# Altium PCB ANALOG_CAN2.PcbDoc (part 2 of 2)
Units mm, origin at the board's own origin, x right, y up, seen from the top; angles counter-clockwise.
Board outline 100 x 55 mm, 2 copper layers (Top Layer, Bottom Layer); 137 components, 132 nets, 459 pads, 72 vias.
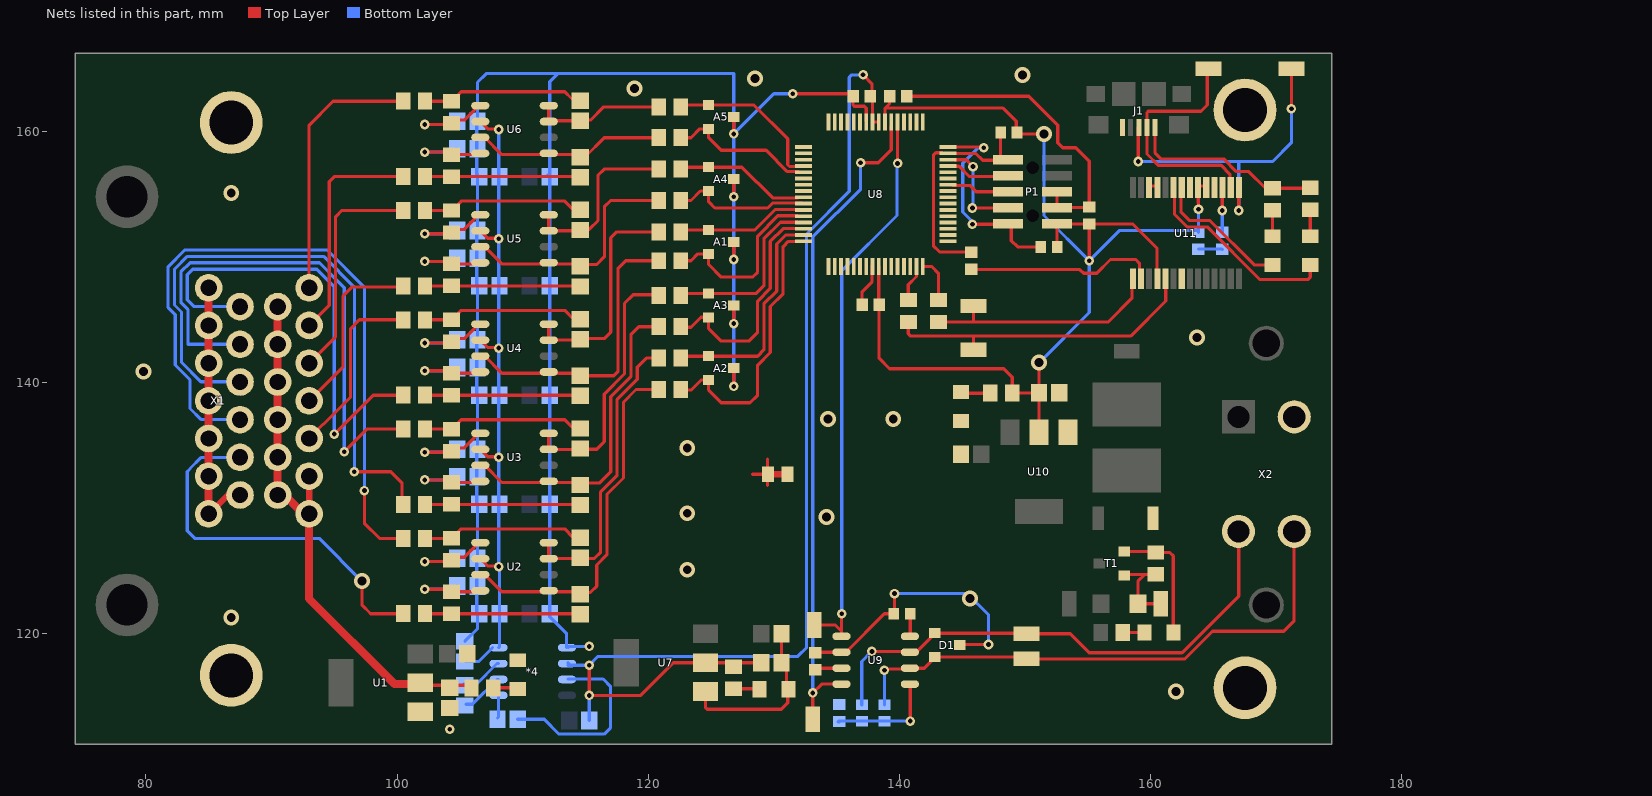
[diagram p2: the nets of this part, all layers, seen from the top]

## Via types
v1: diameter 0.762, hole 0.381, Top Layer to Bottom Layer, 54 vias
v2: diameter 1.27, hole 0.711, Top Layer to Bottom Layer, 18 vias

## Nets (pads, with @x,y where several pads share a name; then routed paths per layer and width w, separated by ;. In a path a pad name is that pad's centre, name@x,y a point inside that pad or via, vN(x,y) a via of type N, cw(c..) or ccw(c..) an arc to the next point about the centre after c; other vN are vias at no path point) (continued)
-10V: *4.4 C33.1 C34.1 C35.1 C36.1 C37.1 C49.2 U2.2 U3.2 U4.2 U5.2 U6.2 | length 52.6
  Top Layer w0.254: U2.2@106.625,125.985 107.214,125.396 108.054,125.396 v1(108.1,125.35) ; U3.2@106.625,134.685 107.214,134.096 108.054,134.096 v1(108.1,134.05) ; U4.2@106.625,143.385 107.214,142.796 108.054,142.796 v1(108.1,142.75) ; U5.2@106.625,152.085 107.214,151.496 108.054,151.496 v1(108.1,151.45) ; U6.2@106.625,160.785 107.214,160.196 108.054,160.196 v1(108.1,160.15)
  Bottom Layer w0.254: C49.2@105.4,117.8 106.5,117.8 *4.4@107.6,118.9 ; *4.4@108.1,118.9 108.15,118.95 C34.1@108.15,121.6 108.15,125.25 108.1,125.3 v1(108.1,125.35) 108.1,130.3 v1(108.1,134.05) 108.1,139 v1(108.1,142.75) 108.1,147.7 v1(108.1,151.45) 108.1,156.5 v1(108.1,160.15)
AGND: *4.5 A1.3 A2.3 A3.3 A4.3 A5.3 C1.1 C2.1 C13.1 C14.1 C16.1 C27.1 C28.1 C29.1 C30.1 C31.1 C33.2 C34.2 C35.2 C36.2 C37.2 C38.1 C39.1 C40.1 C41.1 C42.1 C43.1 C44.1 C45.1 C46.1 C47.1 C49.1 LED.2@109.6,117.9 LED.2@131.15,115.6 N1.1 pad.1@86.8,116.7 pad.1@86.8,160.7 U1.1 U7.1 U8.10 X1.19 X1.20 X1.21 X1.22 X1.23 X1.24 X1.25 X1.26 | length 197
  Top Layer w0.254: X1.19@86.6,131.1 87.45,131.1 X1.19@87.5,131.05 ; U7.1@124.55,115.4 124.55,114.15 124.7,114 130.6,114 131.1,114.5 LED.2@131.1,115.6 ; v1(126.8,139.7) A2.3@126.8,141.05 ; v1(126.8,144.7) A3.3@126.8,146.05 ; v1(126.8,149.8) A1.3@126.8,151.15 ; v1(126.8,154.8) A4.3@126.8,156.15 ; v1(126.8,159.8) A5.3@126.8,161.15 ; 128.3,132.7 N1.1@129.169,132.7 ; 129.5,131.8 N1.1@129.5,132.369 ; N1.1@129.5,133.3 129.5,133.9 ; C14.1@130.6,117.4 C13.1@130.6,120 ; C14.1@131,117.5 131,115.75 LED.2@131.15,115.6 ; v1(131.5,163) 136.3,163 C16.1@136.4,162.9 ; C16.1@136.3,162.7 136.3,162.1 136.4,162 137.2,162 137.35,161.85 U8.10@137.35,160.75 ; C16.1@136.3,163.075 C16.1@136.325,163.1
  Top Layer w0.5: X1.26@85,129.5 X1.19@86.6,131.1
  Top Layer w0.635: X1.26@85,129.55 X1.25@85,132.55 X1.24@85,135.55 X1.23@85,138.55 X1.22@85,141.55 X1.21@85,144.55 X1.20@85,147.55 X1.20@85,147.6
  Bottom Layer w0.254: C49.1@105.4,119.4 106.4,120.4 C34.2@106.4,121.6 ; C34.2@106.35,121.6 C39.1@106.35,126.009 ; C33.2@106.35,130.3 C41.1@106.35,134.709 ; C35.2@106.35,139 C43.1@106.35,143.409 ; C36.2@106.35,147.7 C45.1@106.35,152.109 ; C37.2@106.35,156.4 106.35,158.604 C47.1@106.35,160.809 ; C39.1@106.4,126.009 C33.2@106.4,130.3 ; C41.1@106.4,134.709 C35.2@106.4,139.1 ; C43.1@106.4,143.409 C36.2@106.4,147.8 ; C45.1@106.4,152.109 C37.2@106.4,156.6 ; C47.1@106.4,160.808 106.4,163.9 107.1,164.6 112.8,164.6 ; C31.1@112,156.5 C31.1@112.15,156.65 ; *4.5@113.5,118.9 113.5,120 112.15,121.35 C27.1@112.15,121.6 C28.1@112.15,130.3 C29.1@112.15,139 C30.1@112.15,147.7 C31.1@112.15,156.4 C31.1@112.15,156.65 ; *4.5@113.6,118.9 113.7,119 v1(115.3,119) ; v1(126.8,139.7) v1(126.8,144.7) v1(126.8,149.8) v1(126.8,154.8) v1(126.8,159.8) ; v1(131.5,163) 130,163 v1(126.8,159.8) ; C31.1@112.15,156.65 112.15,163.95 112.8,164.6 ; 112.8,164.6 126.8,164.6 v1(126.8,159.8)
  other v1: 104.2,112.4
  other v2: 86.8,121.3 123.1,125.1 123.1,129.6 123.1,134.8 79.8,140.9 86.8,155.1 118.9,163.4 128.5,164.2
AVCC: *4.6 C14.2 C16.2 C26.2 R32.1 U7.2 U8.8 U8.9 | length 91
  Top Layer w0.254: v1(115.3,117.5) v1(115.3,115.1) 119.4,115.1 122,117.7 U7.2@124.55,117.7 C14.2@128.8,117.7 ; v1(137.1,164.5) 137.8,163.8 C16.2@137.8,162.9 ; C16.2@137.8,162.8 137.85,162.75 U8.9@137.85,160.75 138.25,160.75 U8.8@138.3,160.7
  Bottom Layer w0.254: *4.6@113.6,117.5 v1(115.3,117.5) 116,118.2 131.9,118.2 132.592,118.892 132.592,132.6 ; *4.6@113.6,117.7 *4.6@113.7,117.6 ; C26.2@115.3,113.1 v1(115.3,115.1) ; 132.592,132.692 132.592,151.81 136,155.218 136,164.3 136.2,164.5 v1(137.1,164.5)
CAN_N: D1.2 R43.1 TEST_CANN1.1 U9.6 X2.3 | length 44.8
  Top Layer w0.254: v1(138.8,117.1) 138.9,117.2 U9.6@140.8,117.2 ; U9.6@140.825,117.265 141.965,117.265 142.8,118.1 D1.2@142.8,118.15 TEST_CANN1.1@150.05,118.15 ; TEST_CANN1.1@150.1,118.2 TEST_CANN1.1@150.05,118.15 ; X2.3@171.4,128.1 171.4,121 170.6,120.2 164.918,120.2 162.71,117.992 154.89,117.992 154.882,118 150.2,118 150.1,117.9 149.8,117.9 TEST_CANN1.1@150.05,118.15
  Bottom Layer w0.254: R43.1@138.8,114.35 v1(138.8,117.1)
CAN_P: D1.1 R44.2 TEST_CANP1.1 U9.7 X2.4 | length 42
  Top Layer w0.254: v1(137.8,118.6) U9.7@140.8,118.6 ; U9.7@140.825,118.535 141.335,118.535 142.8,120 D1.1@142.8,120.05 150.05,120.05 TEST_CANP1.1@150.1,120.1 ; TEST_CANP1.1@150.1,120 153.6,120 155.1,118.5 162.5,118.5 167,123 X2.4@167,128.1
  Bottom Layer w0.254: R44.2@137,114.35 137,117.8 v1(137.8,118.6)
D_N: J1.2 TEST_USBD_N1.1 U11.16 | length 19.3
  Top Layer w0.254: TEST_USBD_N1.1@164.5,164.8 164.5,162.1 164,161.6 159.8,161.6 159.7,161.5 J1.2@159.7,160.3 159.7,158.2 160.6,157.3 165.6,157.3 166.3,156.6 166.3,155.7 U11.16@166.35,155.65
D_P: J1.3 TEST_USBD_P1.1 U11.15 | length 26.7
  Top Layer w0.254: v1(159,157.6) J1.3@159,160.3 ; v1(167,153.7) U11.15@167,155.65 ; v1(171.2,161.8) 171.2,164.4
  Bottom Layer w0.254: v1(159,157.6) 167,157.6 ; v1(167,153.7) 167,157.6 ; v1(171.2,161.8) 171.2,159.1 169.7,157.6 167,157.6
DGND: C15.1 C17.1 C18.1 C19.1 C21.1 C22.1 C23.1 C24.1 C25.1 D1.3 D3.1 J1.5 LED.2@144.9,136.95 N1.2 P1.3 P1.5 pad.1@167.5,115.7 pad.1@167.5,161.7 POWER1.2 R33.1 R40.1 T1.2 U8.40 U9.2 U10.1 U11.7 U11.18 U11.21 U11.25 U11.26 X2.2 | length 63.5
  Top Layer w0.254: C15.1@133.3,118.5 133.335,118.535 U9.2@135.375,118.535 ; U9.2@135.4,118.5 135.7,118.5 138.8,121.6 R33.1@139.55,121.6 ; C17.1@137.025,146.2 137.025,147.225 137.8,148 U8.40@137.8,149.3 ; R33.1@139.6,121.6 v1(139.6,123.2) ; C18.1@140.575,162.8 149.937,162.8 ; D1.3@144.8,119.1 144.85,119.15 v1(147.087,119.15) ; 149.9,162.8 150.3,162.8 152.6,160.5 152.6,159.1 153,158.7 154.037,158.7 155.1,157.637 155.1,153.9 155.07,153.93 P1.3@152.55,153.93 152.55,155.15 P1.5@152.5,155.2 ; C21.1@152.7,138.8 C21.1@152.7,139.2 ; T1.2@157.9,126.55 R40.1@160.15,126.55 ; U11.26@159.85,155.65 U11.25@160.45,155.65 ; R40.1@160.1,126.6 R40.1@160.15,126.55 ; R40.1@160.2,126.6 R40.1@160.15,126.55 ; R40.1@160.4,126.475 161.525,126.475 161.8,126.2 POWER1.2@161.8,120.1 ; U11.25@160.5,155.65 U11.25@160.5,155.7
  Bottom Layer w0.254: v1(139.6,123.2) 145.4,123.2 147.087,121.513 v1(147.087,119.15) ; C24.1@163.8,150.625 165.675,150.625 C23.1@165.7,150.6
  other v2: 162,115.4 145.6,122.8 134.2,129.3 134.3,137.1 139.5,137.1 163.7,143.6 149.8,164.5
DVCC: C17.2 C18.2 C21.2 C22.2 C24.2 P1.1 R36.1 R37.2 R38.2 U8.7 U8.41 U10.2 U11.4 U11.19 U11.20 | length 93.8
  Top Layer w0.254: U8.41@138.35,149.25 138.35,146.25 C17.2@138.4,146.2 ; C17.2@138.375,146.2 138.375,141.925 139.2,141.1 148.3,141.1 148.98,140.42 R36.1@148.98,139.179 ; U8.7@138.85,160.75 138.85,161.85 ; C18.2@139.2,162.7 139.2,162.2 138.85,161.85 ; R36.1@149,139.2 149.021,139.179 C21.2@151.1,139.179 ; R37.2@149.3,159.9 149.3,160.8 148.25,161.85 138.85,161.85 ; R37.2@149.4,159.9 149.5,159.8 v2(151.5,159.8) ; U10.2@151.1,136.05 C21.2@151.1,139.179 ; C21.2@151.1,139.2 C21.2@151.1,139.179 ; v2(151.109,141.591) C21.2@151.109,139.179 C21.2@151.1,139.179 ; P1.1@152.55,152.66 152.55,150.85 R38.2@152.6,150.8 ; P1.1@153.4,152.6 153.425,152.625 C22.2@155.1,152.625 158.575,152.625 160.5,150.7 U11.4@160.5,148.4 ; v1(155.1,149.7) C22.2@155.1,152.6 ; v1(163.8,153.8) 163.75,155.65 164.35,155.65 U11.19@164.4,155.6 ; U11.19@164.375,155.675 U11.19@164.4,155.7
  Bottom Layer w0.254: v2(151.109,141.591) 155.1,145.581 v1(155.1,149.7) ; v2(151.5,159.8) 151.5,153.3 v1(155.1,149.7) ; C24.2@163.7,152.1 157.5,152.1 v1(155.1,149.7) ; C24.2@163.8,151.975 v1(163.8,153.8)
DVCC_5V: J1.1 R41.2 R42.2 | length 15.5
  Top Layer w0.254: J1.1@160.35,160.3 160.35,158.268 160.81,157.808 165.81,157.808 166.818,156.8 167.8,156.8 169.1,155.5 R41.2@170.2,155.5 ; R41.2@170.2,155.475 172.675,155.475 R42.2@172.7,155.5
FTDI_GREEN: D5.2 U11.23 | length 16.2
  Top Layer w0.254: U11.23@161.892,155.558 161.892,153.39 162.89,152.392 164.508,152.392 168.7,148.2 172.5,148.2 172.7,148.4 D5.2@172.7,149.35
FTDI_RED: D4.2 U11.22 | length 10.7
  Top Layer w0.254: U11.22@162.4,155.28 162.4,153.6 163.1,152.9 164.718,152.9 168.268,149.35 D4.2@169.7,149.35
FTDI_UART_RX: R34.2 U8.47 | length 2.9
  Top Layer w0.254: R34.2@140.7,146.6 140.7,147.8 141.35,148.45 U8.47@141.35,149.25
FTDI_UART_TX: R35.2 U8.48 | length 3.6
  Top Layer w0.254: U8.48@141.858,149.25 142.55,149.25 143.1,148.7 R35.2@143.1,146.575
"IN 1": R10.1 X1.1 | length 21.1
  Top Layer w0.254: X1.1@93,147.55 93,160.5 94.9,162.4 R10.1@100.4,162.4
"IN 2": R9.1 X1.2 | length 18.1
  Top Layer w0.254: X1.2@93,144.55 94.6,146.15 94.6,156 95,156.4 R9.1@100.4,156.4
"IN 3": R8.1 X1.3 | length 18.1
  Top Layer w0.254: X1.3@93,141.55 95.108,143.658 95.108,153.208 95.6,153.7 R8.1@100.5,153.7
"IN 4": R7.1 X1.4 | length 14.6
  Top Layer w0.254: X1.4@93,138.55 95.7,141.25 95.7,146.9 96.4,147.6 R7.1@100.5,147.6
"IN 5": R6.1 X1.5 | length 14.6
  Top Layer w0.254: X1.5@93,135.55 93,135.578 94.084,136.662 94.112,136.662 96.3,138.85 96.3,144.3 97,145 R6.1@100.5,145
"IN 6": R5.1 X1.14 | length 37.7
  Top Layer w0.254: v1(95,135.9) 98.1,139 R5.1@100.4,139
  Bottom Layer w0.254: X1.14@87.5,146.05 83.85,146.05 83.3,146.6 83.3,148.6 83.731,149.031 93.613,149.031 95,147.645 95,136.059 95.054,136.005 95.054,135.795 94.992,135.733 94.967,135.733 95,135.766 v1(95,135.9)
"IN 7": R4.1 X1.15 | length 42.6
  Top Layer w0.254: v1(95.8,134.5) 97.6,136.3 R4.1@100.3,136.3
  Bottom Layer w0.254: X1.15@87.5,143.05 83.35,143.05 83.35,145.832 82.792,146.39 82.792,148.81 83.521,149.539 93.824,149.539 95.8,147.563 v1(95.8,134.5)
"IN 8": R3.1 X1.16 | length 49.2
  Top Layer w0.254: v1(96.6,132.9) 99.5,132.9 100.4,132 R3.1@100.4,130.4
  Bottom Layer w0.254: X1.16@87.5,140.05 87.5,140.069 84.387,140.069 82.842,141.614 82.842,145.621 82.284,146.179 82.284,149.021 83.31,150.047 94.153,150.047 96.6,147.6 v1(96.6,132.9)
"IN 9": R2.1 X1.17 | length 56.1
  Top Layer w0.254: v1(97.4,131.4) 97.4,128.8 98.6,127.6 R2.1@100.4,127.6
  Bottom Layer w0.254: X1.17@87.5,137.05 87.5,137.069 84.387,137.069 83.519,137.937 83.519,140.218 82.334,141.403 82.334,145.411 81.776,145.969 81.776,149.231 83.1,150.555 94.445,150.555 97.4,147.6 v1(97.4,131.4)
"IN 10": R1.1 X1.18 | length 30.5
  Top Layer w0.254: v2(97.2,124.2) 97.2,122.3 97.375,122.125 97.725,121.775 97.9,121.6 R1.1@100.5,121.6
  Bottom Layer w0.254: X1.18@87.5,134.05 87.5,134.031 84.387,134.031 83.519,133.163 83.519,133.119 83.3,132.9 83.3,128.2 83.9,127.6 93.8,127.6 v2(97.2,124.2)
JTAG_RST: C20.2 P1.10 R37.1 U8.63 | length 17.1
  Top Layer w0.254: U8.63@143.4,158.3 142.895,158.3 142.7,158.105 142.7,150.9 143.2,150.4 145.675,150.4 C20.2@145.7,150.375 ; U8.63@144.35,158.242 146.08,158.242 146.622,157.7 P1.10@147.8,157.7 ; R37.1@148.05,159.9 148.05,157.75 P1.10@148.1,157.7
JTAG_TCLK: P1.4 U8.62 | length 7.8
  Top Layer w0.254: U8.62@144.35,157.734 145.315,157.734 v1(145.85,157.2) ; v1(145.8,153.9) P1.4@148.55,153.9
  Bottom Layer w0.254: v1(145.8,153.9) 145.85,153.95 v1(145.85,157.2)
JTAG_TDI: P1.8 U8.61 | length 4.1
  Top Layer w0.254: U8.61@143.85,157.25 143.874,157.226 144.746,157.226 145.572,156.4 P1.8@147.6,156.4
JTAG_TDO: P1.6 U8.58 | length 4.6
  Top Layer w0.254: U8.58@144.2,155.7 145.6,155.7 146.1,155.2 P1.6@148.55,155.2
JTAG_TMS: P1.2 R38.1 U8.64 | length 16.3
  Top Layer w0.254: U8.64@144.35,158.75 146.65,158.75 v1(146.7,158.7) ; v1(145.8,152.6) P1.2@148.49,152.6 ; P1.2@148.9,152.6 148.9,151.3 149.4,150.8 R38.1@151.25,150.8
  Bottom Layer w0.254: v1(145.8,152.6) 145.8,152.823 145.038,153.584 145.038,157.466 146.272,158.7 v1(146.7,158.7)
Net*1_1: LED.1@144.9,139.25 R36.2 | length 1.7
  Top Layer w0.254: LED.1@145.5,139.15 147.15,139.15 R36.2@147.2,139.2
Net*2_1: LED.1@128.85,115.6 R32.2 | length 1.8
  Top Layer w0.254: R32.2@126.7,115.625 128.475,115.625 LED.1@128.5,115.6
Net*3_1: LED.1@109.6,115.6 R21.2 | length 1.9
  Top Layer w0.254: R21.2@107.675,115.7 LED.1@109.6,115.7
Net*4_1: *4.1 C32.1 | length 1.8
  Bottom Layer w0.254: C32.1@108,113.3 108.075,113.375 *4.1@108.075,115.095
Net*4_2: *4.2 C48.2 | length 3.4
  Bottom Layer w0.254: C48.2@105.5,114.4 105.992,114.4 107.957,116.365 *4.2@108.075,116.365
Net*4_3: *4.3 C48.1 | length 3.5
  Bottom Layer w0.254: C48.1@105.3,116 106.322,116 107.957,117.635 *4.3@108.075,117.635
Net*4_7: *4.7 C32.2 | length 15
  Bottom Layer w0.254: C32.2@109.6,113.2 111.711,113.2 112.892,112.019 116.481,112.019 117,112.538 117,115.8 116.4,116.4 *4.7@113.6,116.4
NetA1_1: A5.1 R25.1 U8.20 | length 12.5
  Top Layer w0.254: R25.1@122.7,162.1 A5.1@124.8,162.1 128.4,162.1 131.1,159.4 131.1,157.352 131.245,157.206 U8.20@132,157.206
NetA1_2: A5.2 R27.1 U8.21 | length 11.4
  Top Layer w0.254: R27.1@122.7,159.5 123.4,159.5 124.1,160.2 A5.2@124.8,160.2 124.8,159.5 125.8,158.5 129.377,158.5 131.077,156.8 U8.21@132,156.8
NetA2_1: A4.1 R30.1 U8.25 | length 10.2
  Top Layer w0.254: R30.1@122.7,157.2 122.75,157.15 A4.1@124.8,157.15 127.45,157.15 129.9,154.7 U8.25@131.9,154.7
NetA2_2: A4.2 R26.1 U8.26 | length 11
  Top Layer w0.254: R26.1@122.7,154.5 123.4,154.5 124.15,155.25 A4.2@124.8,155.25 ; A4.2@124.8,155.1 124.8,154.4 125.3,153.9 129.5,153.9 129.892,154.292 132.308,154.292 U8.26@132.35,154.25
NetA3_1: A1.1 R29.1 U8.27 | length 9.9
  Top Layer w0.254: R29.1@122.7,152.2 122.75,152.15 A1.1@124.8,152.15 128.468,152.15 130.102,153.784 U8.27@131.9,153.784
NetA3_2: A1.2 R24.1 U8.28 | length 14.2
  Top Layer w0.254: R24.1@122.7,149.7 123.4,149.7 123.95,150.25 A1.2@124.8,150.25 ; A1.2@124.8,150.1 124.8,149.4 125.8,148.4 128.3,148.4 128.7,148.8 128.7,151.663 130.313,153.276 U8.28@131.9,153.276
NetA4_1: A3.1 R31.1 U8.29 | length 13.6
  Top Layer w0.254: R31.1@122.7,147.1 A3.1@124.8,147.1 128.5,147.1 ; 128.6,147.1 129.208,147.708 129.208,151.453 130.523,152.768 U8.29@131.9,152.768
NetA4_2: A3.2 R22.1 U8.30 | length 18
  Top Layer w0.254: R22.1@122.7,144.4 123.4,144.4 124.2,145.2 A3.2@124.8,145.2 ; A3.2@124.8,145 124.8,144.3 125.8,143.3 128,143.3 128.7,144 128.7,146.482 129.716,147.498 129.716,151.242 130.734,152.26 U8.30@131.9,152.26
NetA5_1: A2.1 R23.1 U8.31 | length 17.5
  Top Layer w0.254: R23.1@122.7,142.1 A2.1@124.8,142.1 128.7,142.1 129.208,142.608 129.208,146.271 130.224,147.287 130.224,151.032 130.944,151.752 U8.31@131.9,151.752
NetA5_2: A2.2 R28.1 U8.32 | length 21.7
  Top Layer w0.254: R28.1@122.7,139.4 123.4,139.4 124.2,140.2 A2.2@124.8,140.2 ; A2.2@124.8,140.1 124.8,139.4 125.8,138.4 128.1,138.4 128.7,139 128.7,141.382 129.716,142.398 129.716,146.061 130.732,147.077 130.732,150.821 131.155,151.244 U8.32@131.9,151.244
NetC17_1: C20.1 U11.2 | length 15.2
  Top Layer w0.254: C20.1@145.8,149.1 145.9,149 154.363,149 154.663,148.7 155.7,148.7 156.8,149.8 158.8,149.8 159.1,149.5 159.1,148.5 U11.2@159.2,148.4
"NetC20_U_Sallen-Key Filter1_1": C4.1 R2.2 R12.1 | length 12.9
  Top Layer w0.254: R2.2@102.266,127.6 R12.1@104.35,127.6 105.1,128.35 113.35,128.35 114,127.7 C4.1@114.6,127.7
"NetC20_U_Sallen-Key Filter1_2": C4.2 R23.2 U2.7 U2.8 | length 23.5
  Top Layer w0.254: U2.7@112.075,125.985 114.485,125.985 C4.2@114.6,126.1 ; U2.8@112.075,127.255 112.075,126.125 U2.7@112.1,126.1 ; C4.2@114.6,126 115.7,126 116.2,126.5 116.2,131.3 117.516,132.616 117.516,138.661 119.124,140.269 119.124,141.224 119.85,141.95 120.75,141.95 R23.2@120.8,142
"NetC20_U_Sallen-Key Filter2_1": C12.1 R10.2 R20.1 | length 12.9
  Top Layer w0.254: R10.2@102.266,162.4 R20.1@104.35,162.4 105.1,163.15 113.35,163.15 113.885,162.615 114.485,162.615 C12.1@114.6,162.5
"NetC20_U_Sallen-Key Filter2_2": C12.2 R25.2 U6.7 U6.8 | length 10.6
  Top Layer w0.254: U6.7@112,160.8 112.075,160.875 U6.8@112.075,162.055 U6.8@112,161.98 ; U6.7@112.1,160.8 112.15,160.85 C12.2@114.6,160.85 ; C12.2@114.6,160.9 115.4,160.9 116.45,161.95 120.75,161.95 R25.2@120.8,162
"NetC20_U_Sallen-Key Filter3_1": C10.1 R8.2 R18.1 | length 12.9
  Top Layer w0.254: R8.2@102.266,153.7 R18.1@104.35,153.7 105.1,154.45 113.35,154.45 114,153.8 C10.1@114.6,153.8
"NetC20_U_Sallen-Key Filter3_2": C10.2 R30.2 U5.7 U5.8 | length 13.4
  Top Layer w0.254: U5.7@112.075,152.085 114.485,152.085 C10.2@114.6,152.2 ; U5.8@112.075,153.355 112.075,152.225 U5.7@112.1,152.2 ; 115.3,152.2 116,152.9 116,156.5 116.5,157 R30.2@120.9,157
"NetC20_U_Sallen-Key Filter4_1": C6.1 R4.2 R14.1 | length 12.9
  Top Layer w0.254: R4.2@102.266,136.3 R14.1@104.35,136.3 105.1,137.05 113.35,137.05 114,136.4 C6.1@114.6,136.4
"NetC20_U_Sallen-Key Filter4_2": C6.2 R31.2 U3.7 U3.8 | length 20.7
  Top Layer w0.254: U3.7@112.075,134.685 114.485,134.685 C6.2@114.55,134.75 ; U3.8@112.075,135.955 112.075,134.825 U3.7@112.1,134.8 ; C6.2@114.575,134.775 C6.2@114.6,134.8 ; C6.2@114.6,134.75 114.6,134.7 115.9,134.7 116.5,135.3 116.5,139.082 118.108,140.69 118.108,146.308 118.8,147 R31.2@120.9,147
"NetC20_U_Sallen-Key Filter5_1": C8.1 R6.2 R16.1 | length 12.9
  Top Layer w0.254: R6.2@102.266,145 R16.1@104.35,145 105.1,145.75 113.35,145.75 114,145.1 C8.1@114.6,145.1
"NetC20_U_Sallen-Key Filter5_2": C8.2 R29.2 U4.7 U4.8 | length 17.9
  Top Layer w0.254: U4.7@112.075,143.385 114.485,143.385 114.6,143.5 116.5,143.5 117.016,144.016 117.016,151.516 117.5,152 R29.2@120.8,152 ; U4.8@112.075,144.655 112.075,143.525 U4.7@112.1,143.5
"NetC22_U_Sallen-Key Filter1_2": C39.2 R12.2 U2.1 | length 7.7
  Top Layer w0.254: v1(102.2,125.75) 104.296,125.75 104.373,125.827 R12.2@104.396,125.85 ; R12.2@104.35,126.1 105.352,126.1 106.507,127.255 U2.1@106.625,127.255
  Bottom Layer w0.254: v1(102.2,125.75) 104.75,125.75 C39.2@104.85,125.85
"NetC22_U_Sallen-Key Filter2_2": C47.2 R20.2 U6.1 | length 7.7
  Top Layer w0.254: v1(102.2,160.55) 104.296,160.55 104.373,160.627 R20.2@104.396,160.65 ; R20.2@104.35,160.9 105.352,160.9 106.507,162.055 U6.1@106.625,162.055
  Bottom Layer w0.254: v1(102.2,160.55) 104.75,160.55 C47.2@104.85,160.65
"NetC22_U_Sallen-Key Filter3_2": C45.2 R18.2 U5.1 | length 7.7
  Top Layer w0.254: v1(102.2,151.85) 104.296,151.85 104.373,151.927 R18.2@104.396,151.95 ; R18.2@104.35,152.2 105.352,152.2 106.507,153.355 U5.1@106.625,153.355
  Bottom Layer w0.254: v1(102.2,151.85) 104.75,151.85 C45.2@104.85,151.95
"NetC22_U_Sallen-Key Filter4_2": C41.2 R14.2 U3.1 | length 7.7
  Top Layer w0.254: v1(102.2,134.45) 104.296,134.45 104.373,134.527 R14.2@104.396,134.55 ; R14.2@104.35,134.8 105.352,134.8 106.507,135.955 U3.1@106.625,135.955
  Bottom Layer w0.254: v1(102.2,134.45) 104.75,134.45 C41.2@104.85,134.55
"NetC22_U_Sallen-Key Filter5_2": C43.2 R16.2 U4.1 | length 7.7
  Top Layer w0.254: v1(102.2,143.15) 104.296,143.15 104.373,143.227 R16.2@104.396,143.25 ; R16.2@104.35,143.5 105.352,143.5 106.507,144.655 U4.1@106.625,144.655
  Bottom Layer w0.254: v1(102.2,143.15) 104.75,143.15 C43.2@104.85,143.25
"NetC23_U_Sallen-Key Filter1_1": C3.1 R1.2 R11.1 | length 12.5
  Top Layer w0.254: R1.2@102.1,121.6 R11.1@104.35,121.6 ; R11.1@104.396,121.6 C3.1@114.6,121.6
"NetC23_U_Sallen-Key Filter1_2": C3.2 R28.2 U2.3 U2.5 | length 28.9
  Top Layer w0.254: U2.3@106.625,124.715 106.985,124.715 108.35,123.35 U2.5@112.075,123.35 ; U2.5@112.1,123.35 U2.5@112.075,123.35 ; C3.2@114.5,123.2 114.35,123.35 112.17,123.35 U2.5@112.075,123.445 U2.5@112.075,123.35 ; C3.2@114.6,123.3 115.4,123.3 115.9,123.8 115.9,125.482 116.708,126.29 116.708,131.09 118.024,132.406 118.024,138.45 119.024,139.45 120.75,139.45 R28.2@120.8,139.5
"NetC23_U_Sallen-Key Filter2_1": C11.1 R9.2 R19.1 | length 12.5
  Top Layer w0.254: R9.2@102.1,156.4 R19.1@104.35,156.4 ; R19.1@104.396,156.4 C11.1@114.6,156.4
"NetC23_U_Sallen-Key Filter2_2": C11.2 R27.2 U6.3 U6.5 | length 15.7
  Top Layer w0.254: U6.3@106.625,159.515 106.985,159.515 108.35,158.15 U6.5@112.075,158.15 ; U6.5@112.1,158.15 U6.5@112.075,158.15 ; C11.2@114.55,157.95 114.35,158.15 112.17,158.15 U6.5@112.075,158.245 U6.5@112.075,158.15 ; C11.2@114.6,158 115,158 116.5,159.5 R27.2@120.9,159.5
"NetC23_U_Sallen-Key Filter3_1": C9.1 R7.2 R17.1 | length 12.5
  Top Layer w0.254: R7.2@102.1,147.7 R17.1@104.35,147.7 ; R17.1@104.396,147.7 C9.1@114.6,147.7
"NetC23_U_Sallen-Key Filter3_2": C9.2 R26.2 U5.3 U5.5 | length 19.4
  Top Layer w0.254: U5.3@106.625,150.815 106.985,150.815 108.35,149.45 U5.5@112.075,149.45 ; U5.5@112.1,149.45 U5.5@112.075,149.45 ; C9.2@114.5,149.3 114.35,149.45 112.17,149.45 U5.5@112.075,149.545 U5.5@112.075,149.45 ; C9.2@114.6,149.4 115.9,149.4 116.508,150.008 116.508,154.008 117,154.5 R26.2@120.9,154.5
"NetC23_U_Sallen-Key Filter4_1": C5.1 R3.2 R13.1 | length 12.5
  Top Layer w0.254: R3.2@102.1,130.3 R13.1@104.35,130.3 ; R13.1@104.396,130.3 C5.1@114.6,130.3
"NetC23_U_Sallen-Key Filter4_2": C5.2 R22.2 U3.3 U3.5 | length 25.3
  Top Layer w0.254: U3.3@106.625,133.415 106.985,133.415 108.35,132.05 U3.5@112.075,132.05 ; U3.5@112.1,132.05 U3.5@112.075,132.05 ; C5.2@114.35,132.05 112.17,132.05 U3.5@112.075,132.145 U3.5@112.075,132.05 ; C5.2@114.575,131.825 C5.2@114.6,131.8 ; C5.2@114.6,132 116.1,132 117.008,132.908 117.008,138.871 118.616,140.479 118.616,143.816 119.25,144.45 120.75,144.45 R22.2@120.8,144.5
"NetC23_U_Sallen-Key Filter5_1": C7.1 R5.2 R15.1 | length 12.5
  Top Layer w0.254: R5.2@102.1,139 R15.1@104.35,139 ; R15.1@104.396,139 C7.1@114.6,139
"NetC23_U_Sallen-Key Filter5_2": C7.2 R24.2 U4.3 U4.5 | length 23.6
  Top Layer w0.254: U4.3@106.625,142.115 106.985,142.115 108.35,140.75 U4.5@112.075,140.75 ; U4.5@112.1,140.75 U4.5@112.075,140.75 ; C7.2@114.575,140.525 114.35,140.75 112.17,140.75 U4.5@112.075,140.845 U4.5@112.075,140.75 ; C7.2@114.6,140.55 117.25,140.55 117.6,140.9 117.6,149.1 118.2,149.7 R24.2@120.8,149.7
"NetC25_U_Sallen-Key Filter1_2": C38.2 R11.2 U2.4 | length 7.1
  Top Layer w0.254: v1(102.2,123.55) 104.05,123.55 104.1,123.6 R11.2@104.35,123.35 ; R11.2@104.396,123.35 U2.4@106.6,123.35
  Bottom Layer w0.254: v1(102.2,123.55) 104.496,123.55 104.546,123.6 C38.2@104.75,123.804
"NetC25_U_Sallen-Key Filter2_2": C46.2 R19.2 U6.4 | length 7.1
  Top Layer w0.254: v1(102.2,158.35) 104.05,158.35 104.1,158.4 R19.2@104.35,158.15 ; R19.2@104.396,158.15 U6.4@106.6,158.15
  Bottom Layer w0.254: v1(102.2,158.35) 104.496,158.35 104.546,158.4 C46.2@104.75,158.604
"NetC25_U_Sallen-Key Filter3_2": C44.2 R17.2 U5.4 | length 7.1
  Top Layer w0.254: v1(102.2,149.65) 104.05,149.65 104.1,149.7 R17.2@104.35,149.45 ; R17.2@104.396,149.45 U5.4@106.6,149.45
  Bottom Layer w0.254: v1(102.2,149.65) 104.496,149.65 104.546,149.7 C44.2@104.75,149.904
"NetC25_U_Sallen-Key Filter4_2": C40.2 R13.2 U3.4 | length 7.1
  Top Layer w0.254: v1(102.2,132.25) 104.05,132.25 104.1,132.3 R13.2@104.35,132.05 ; R13.2@104.396,132.05 U3.4@106.6,132.05
  Bottom Layer w0.254: v1(102.2,132.25) 104.496,132.25 104.546,132.3 C40.2@104.75,132.504
"NetC25_U_Sallen-Key Filter5_2": C42.2 R15.2 U4.4 | length 7.1
  Top Layer w0.254: v1(102.2,140.95) 104.05,140.95 104.1,141 R15.2@104.35,140.75 ; R15.2@104.396,140.75 U4.4@106.6,140.75
  Bottom Layer w0.254: v1(102.2,140.95) 104.496,140.95 104.546,141 C42.2@104.75,141.204
NetD1_1: D2.1 OVP_G1.1 R40.2 T1.1 | length 6.7
  Top Layer w0.254: T1.1@158,124.7 158.025,124.725 R40.2@160.4,124.725 ; 159.5,124.7 158.975,124.175 D2.1@158.975,122.4 OVP_G1.1@160.7,122.4
NetD4_1: D5.1 R42.1 | length 2.1
  Top Layer w0.254: D5.1@172.7,151.6 R42.1@172.7,153.75
NetD5_1: D4.1 R41.1 | length 2.1
  Top Layer w0.254: D4.1@169.7,151.65 R41.1@169.7,153.7
NetPOWER1_1: POWER1.1 R39.1 | length 1.8
  Top Layer w0.254: R39.1@157.7,120.1 R39.1@157.775,120.1 POWER1.1@159.5,120.1
NetR21_1: R35.1 U11.1 UART_TX1.1 | length 19
  Top Layer w0.254: R35.1@143.1,144.825 145.9,144.825 ; UART_TX1.1@145.9,146 145.9,144.825 ; U11.1@158.5,148.3 158.5,146.7 156.625,144.825 145.9,144.825
NetR22_1: R34.1 U11.5 UART_RX1.1 | length 25.5
  Top Layer w0.254: R34.1@140.7,144.8 140.7,143.9 140.9,143.7 145.9,143.7 ; UART_RX1.1@145.9,142.6 145.9,143.7 ; U11.5@161.2,148.3 161.2,146.5 158.4,143.7 145.9,143.7
NetU5_1: U8.1
NetU5_2: U8.2
NetU5_3: U8.3
NetU5_4: U8.4
NetU5_11: U8.11
NetU5_12: U8.12
NetU5_13: U8.13
NetU5_14: U8.14
NetU5_15: U8.15
NetU5_16: U8.16
NetU5_17: U8.17
NetU5_18: U8.18
NetU5_19: U8.19
NetU5_22: U8.22
NetU5_23: U8.23
NetU5_24: U8.24
NetU5_33: U8.33
NetU5_34: U8.34
NetU5_35: U8.35
NetU5_36: U8.36
NetU5_37: U8.37
NetU5_38: U8.38
NetU5_39: U8.39
NetU5_42: U8.42
NetU5_43: U8.43
NetU5_44: U8.44
NetU5_45: U8.45
NetU5_46: U8.46
NetU5_49: U8.49
NetU5_50: U8.50
NetU5_51: U8.51
NetU5_52: U8.52
NetU5_53: U8.53
NetU5_54: U8.54
NetU5_55: U8.55
NetU5_56: U8.56
NetU5_57: U8.57
NetU5_59: U8.59
NetU5_60: U8.60
RX_CAN: TEST_CANRX1.1 U8.6 U9.4 | length 53.2
  Top Layer w0.254: TEST_CANRX1.1@133.1,113.2 v1(133.1,115.3) 133.795,115.995 U9.4@135.375,115.995 ; v1(136.9,157.5) 138.3,157.5 139.342,158.542 U8.6@139.342,160.4
  Bottom Layer w0.254: v1(133.1,115.3) 133.1,151.6 136.9,155.4 v1(136.9,157.5)
SIGPWR: C2.2 R21.1 U1.2 X1.6 X1.7 X1.8 X1.9 X1.10 X1.11 X1.12 X1.13 | length 43.2
  Top Layer w0.254: X1.7@92.55,129.55 X1.7@93,129.55 ; U1.2@101.85,116.1 102.05,115.9 104.2,115.9 R21.1@105.9,115.9
  Top Layer w0.5: X1.8@90.5,146.05 X1.8@90.5,146.1 ; X1.7@93,129.55 X1.6@93,132.4
  Top Layer w0.635: X1.13@90.5,131.4 X1.12@90.5,134.05 X1.11@90.5,137.05 X1.10@90.5,140.05 X1.9@90.5,143.05 X1.8@90.5,146.05 ; X1.13@90.7,131.4 X1.7@92.55,129.55 ; X1.7@93,129.55 93,122.8 99.8,116 U1.2@101.9,116
SPLIT: C25.2 R43.2 R44.1 U9.5 | length 8.7
  Top Layer w0.254: v1(140.85,113.05) 140.85,115.85 U9.5@140.9,115.9
  Bottom Layer w0.254: C25.2@135.1,113 135.15,113.05 C25.2@135.25,113.05 ; C25.2@135.2,113 C25.2@135.25,113.05 ; v1(140.85,113.05) R43.2@138.8,113.05 C25.2@135.25,113.05
STBY: R33.2 U9.8 | length 1.8
  Top Layer w0.254: U9.8@140.8,119.8 140.85,119.85 R33.2@140.85,121.6
TX_CAN: TEST_CANTX1.1 U8.5 U9.1 | length 45.1
  Top Layer w0.254: TEST_CANTX1.1@133.2,120.7 134.9,120.7 135.3,120.3 ; U9.1@135.375,119.805 135.375,121.575 v1(135.4,121.6) 135.41,121.6 v1@135.5,121.51 ; v1(139.85,157.45) U8.5@139.85,160.75
  Bottom Layer w0.254: v1(135.4,121.6) 135.4,148.9 139.8,153.3 v1@139.8,157.4
VCC: C15.2 U9.3 | length 2.1
  Top Layer w0.254: C15.2@133.3,117.2 133.365,117.265 U9.3@135.375,117.265
VCC_3V3: C23.2 U11.17 | length 3.5
  Top Layer w0.254: v1(165.7,153.7) U11.17@165.7,155.5
  Bottom Layer w0.254: C23.2@165.7,152 v1(165.7,153.7)
pads on no net: J1.4 J1.6 J1.7 J1.8 J1.9 J1.10 J1.11 P1.7 P1.9 P1.MH1 P1.MH2 U1.THM U7.THM U10.THM U11.3 U11.6 U11.8 U11.9 U11.10 U11.11 U11.12 U11.13 U11.14 U11.24 U11.27 U11.28 X1.CH X1.RH X2.None

## Polygon pours and split planes (outlines as drawn)
DGND on Top Layer "Top Layer-DGND" (solid, pour order 0): 130.303,165.7 174.2,165.7 174.2,111.8 173.8,111.4 130.303,111.4
AGND on Top Layer "Top Layer-AGND" (solid, pour order 4): 74.4,165.5 129.8,165.5 129.8,111.6 129.4,111.2 74.4,111.2
DGND on Bottom Layer "Bottom Layer-DGND" (solid, pour order 2): 130.214,165.778 174.112,165.778 174.112,111.878 173.712,111.478 130.214,111.478
AGND on Bottom Layer "Bottom Layer-AGND" (solid, pour order 6): 74.5,165.7 129.9,165.7 129.9,111.8 129.5,111.4 74.5,111.4

## Keep-outs
Keep-Out Layer:
  the board outline again, w0.254

## Silkscreen, mask and mechanical layers (free items; w line width, h text height)
Bottom Overlay:
  text "Design By: Albert Panuco / Layout By: Albert Panuco" at 162.8,130.4 h1.02
  text "a" at 163,121.3 h17.78

## Text inside footprints (layer, text, board x,y; h text height)
D4: Top Overlay "*" at 170.208,148.976 h1.52 r270
D5: Top Overlay "*" at 173.208,148.976 h1.52 r270
LED: Top Overlay "*" at 109.092,118.274 h1.52 r90
LED: Top Overlay "*" at 145.408,136.576 h1.52 r270
LED: Top Overlay "*" at 131.524,116.108 h1.52
POWER1: Top Overlay "*" at 162.174,120.608 h1.52
X1: Top Overlay "SUPER SEAL 26POS" at 76.8,151 h1.52 r270